# Altium PCB PCB_RedoVR noMAX_2_2023-05-25.pcbdoc
Units mil, origin at the board's own origin, x right, y up, seen from the top; angles counter-clockwise.
Board outline 3112.99 x 2445 mil, 2 copper layers (Top Layer, Bottom Layer); 45 components, 30 nets, 109 pads, 50 vias.
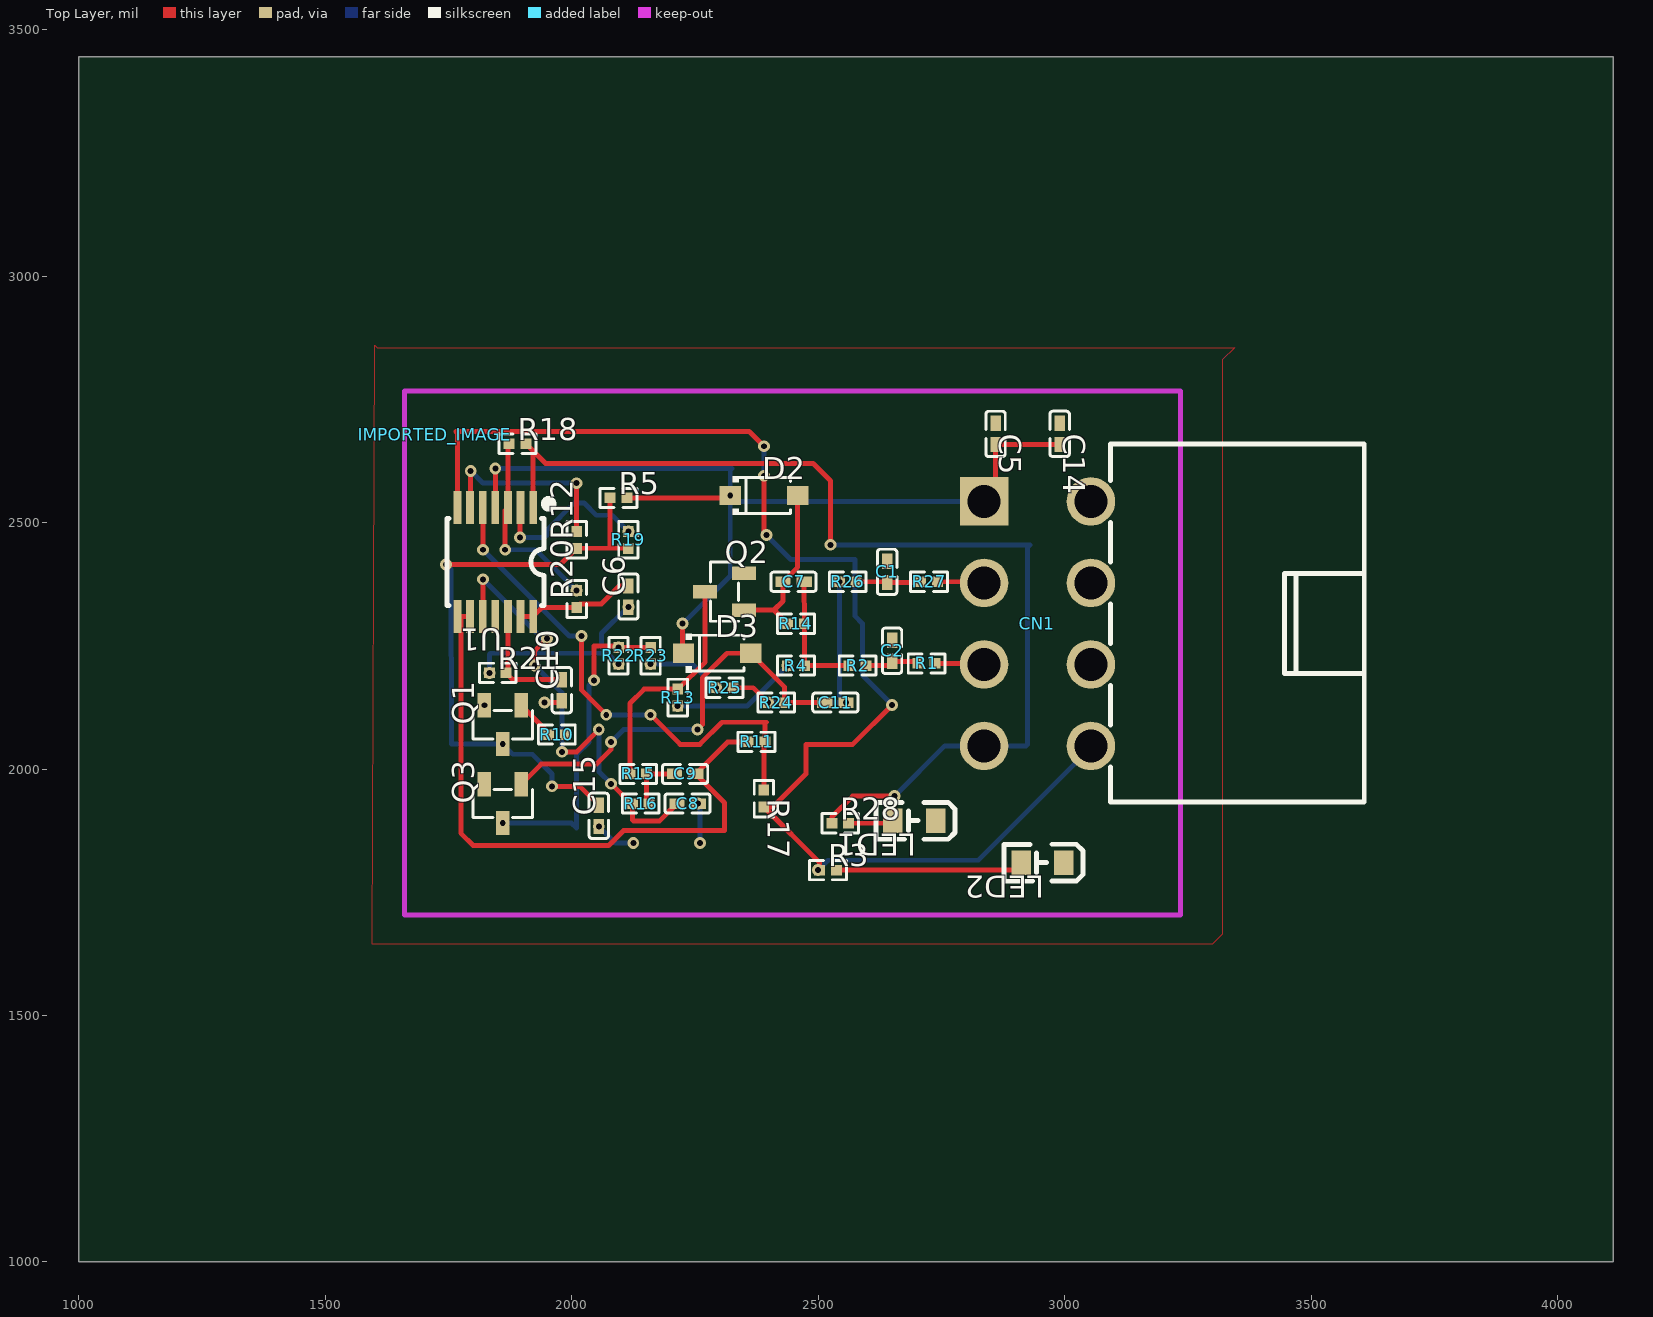
[diagram p0: Top Layer view]
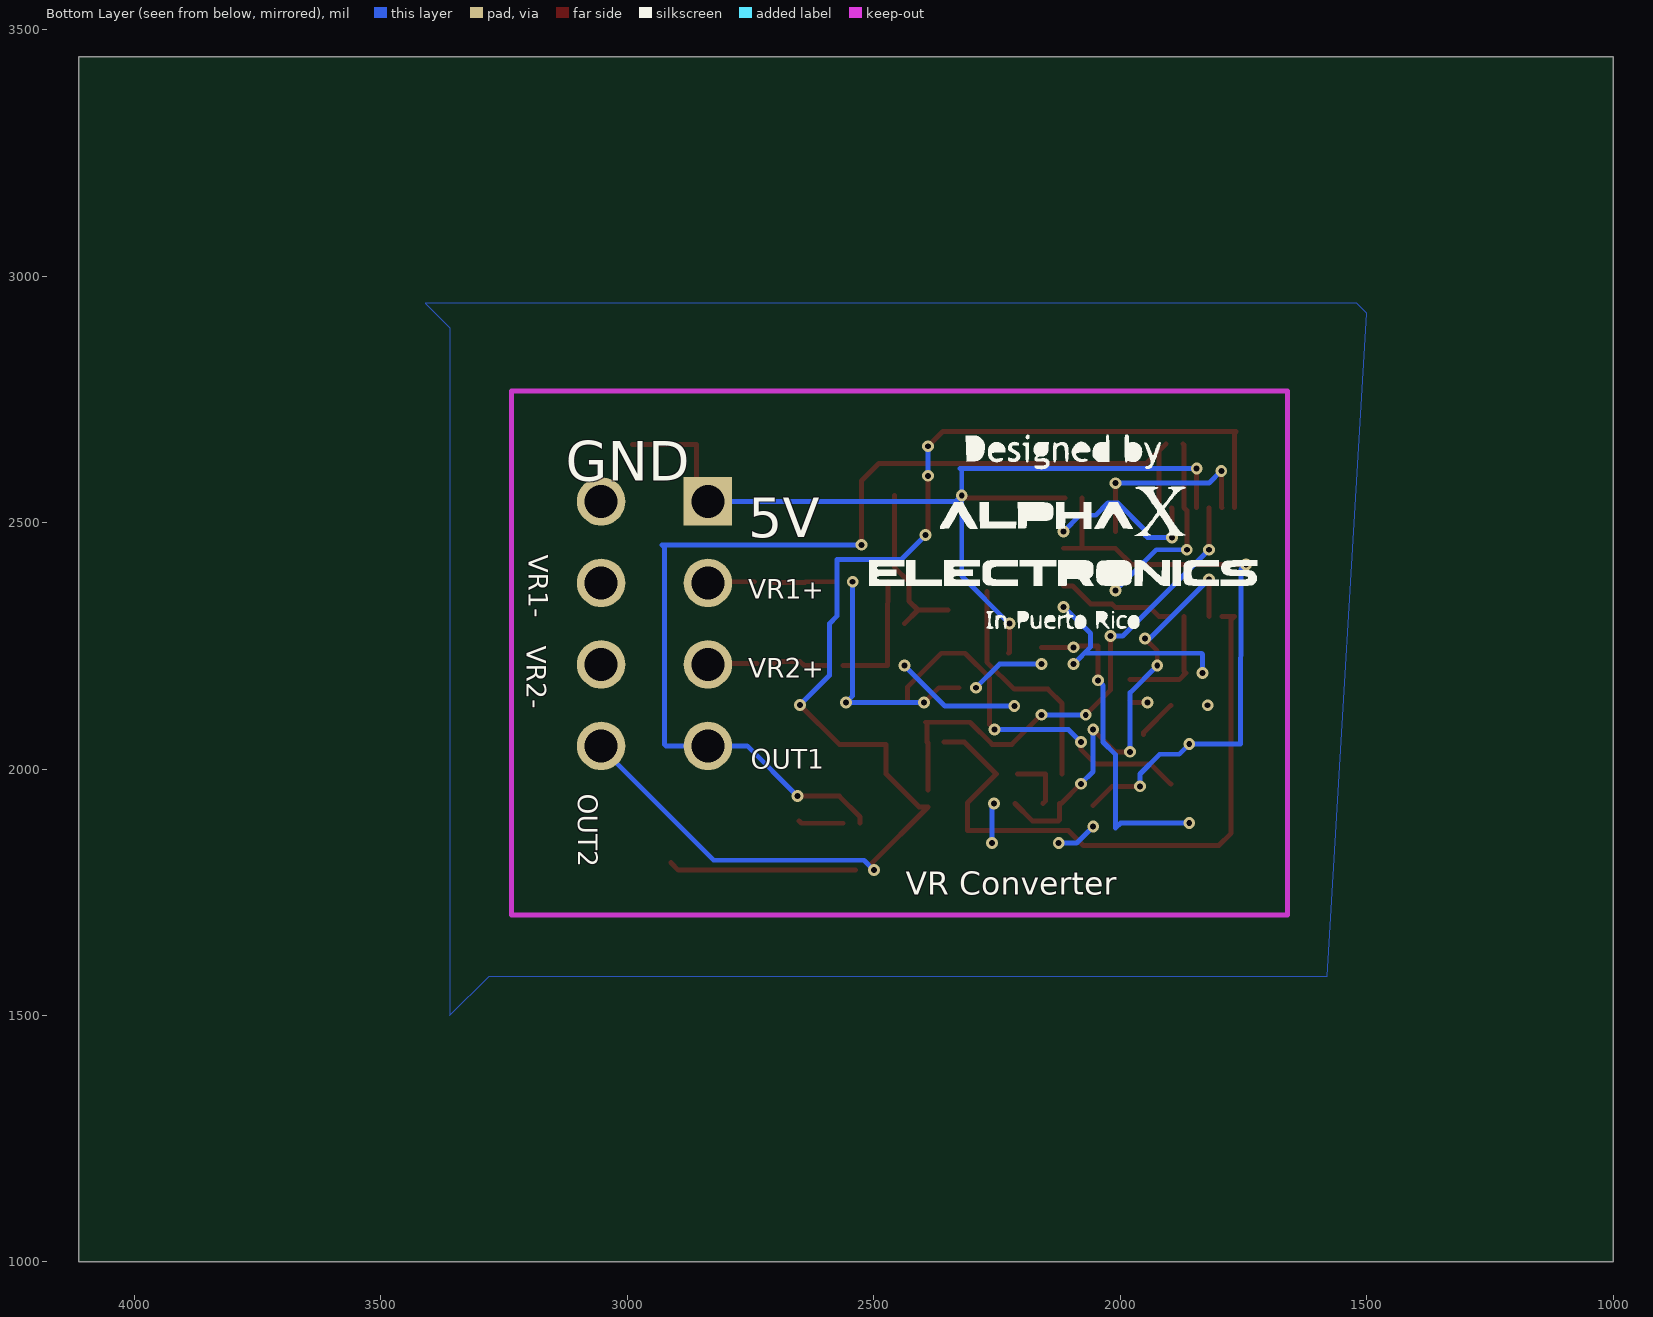
[diagram p1: Bottom Layer view, seen from below]

## Layer stack, top to bottom
Top Layer: signal copper (thickness not stored)
Dielectric: dielectric 12.6, FR-4, Dk 4.8
Bottom Layer: signal copper (thickness not stored)

## Board outline
4112.99,1000 1000,1000 1000,3445 4112.99,3445

## Components (designator, comment, footprint, x,y, rotation, side; value= is the part's Value field where it differs from the comment)
C1 "10nF" C0402 2640,2400 r270 top
C2 "10nF" C0402 2650,2240 r270 top
C5 "10uF" C0402 2860,2680 r270 top
C6 "1nF" C0402 2115,2350 r90 top
C7 "1nF" C0402 2450,2380 r180 top
C8 "100pF" C0402 2235,1930 r180 top
C9 "1nF" C0402 2230,1990 r0 top
C10 "100pF" C0402 1980,2160 r90 top
C11 "1nF" C0402 2535,2135 r180 top
C14 "100nF" C0402 2990,2680 r270 top
C15 "100nF" C0402 2055,1905 r90 top
CN1 "5557R-2*4P" CONN-TH_8P-P4.20_5557R-2X4P 2945,2295 r90 top
D2 "1N4148W_C81598" SOD-123F_L2.7-W1.6-LS3.8-RD 2390,2555 r0 top
D3 "1N4148W_C81598" SOD-123F_L2.7-W1.6-LS3.8-RD 2295,2235 r0 top
IMPORTED_IMAGE "IMPORTED_IMAGE" IMPORTED_IMAGE 1722.42,2678.34 r0 top
LED1 "XL-0805QBC" LED0805-RD 2695,1895 r180 top
LED2 "XL-0805QBC" LED0805-RD 2955,1810 r180 top
Q1 "BC857B_C475636" SOT-23-3_L2.9-W1.3-P1.90-LS2.4-BR 1860,2090 r90 top
Q2 "BC857B_C475636" SOT-23-3_L2.9-W1.3-P1.90-LS2.4-BR 2310,2360 r0 top
Q3 "BC857B_C475636" SOT-23-3_L2.9-W1.3-P1.90-LS2.4-BR 1860,1930 r90 top
R1 "1kΩ" R0402 2720,2214.23 r180 top
R2 "1kΩ" R0402 2580,2210 r180 top
R3 "10kΩ" R0402 2520,1795 r0 top
R4 "1MΩ" R0402 2455,2210 r180 top
R5 "100kΩ" R0402 2095,2550 r0 top
R10 "10kΩ" R0402 1970,2070 r0 top
R11 "1kΩ" R0402 2375,2055 r0 top
R12 "1kΩ" R0402 2010,2465 r90 top
R13 "100kΩ" R0402 2215,2145 r270 top
R14 "47kΩ" R0402 2455,2295 r180 top
R15 "27kΩ" R0402 2135,1990 r0 top
R16 "330kΩ" R0402 2140,1930 r180 top
R17 "100kΩ" R0402 2390,1940 r270 top
R18 "100kΩ" R0402 1890,2660 r0 top
R19 "1kΩ" R0402 2115,2465 r90 top
R20 "1kΩ" R0402 2010,2345 r90 top
R21 "330kΩ" R0402 1850,2195 r0 top
R22 "27kΩ" R0402 2095,2230 r270 top
R23 "100kΩ" R0402 2160,2230 r270 top
R24 "47kΩ" R0402 2415,2135 r0 top
R25 "1MΩ" R0402 2310,2165 r180 top
R26 "1kΩ" R0402 2560,2380 r180 top
R27 "1kΩ" R0402 2725,2380 r180 top
R28 "10kΩ" R0402 2545,1890 r0 top
U1 "MCP6004T-I/ST" TSSOP-14_L5.0-W4.4-P0.65-LS6.4-BL 1845,2420 r180 top

## Footprints (in the part's own frame and the unit in brackets; to place one, negate y for a bottom-side part, rotate by r counter-clockwise, add the part's x,y. Pads: shape width x height; smd on the part's side, far side on the other; paste and mask are expansions set on the pad)
C0402 [mm]
  rect 0.79x0.54 smd: 1(-0.545,0) 2(0.545,0)
  silkscreen extent -1.17,-0.5 1.17,0.5
CONN-TH_8P-P4.20_5557R-2X4P [mm]
  rect 2.5x2.5 hole 1.7: 1(6.3,2.75)
  round 2.5 hole 1.7: 2(6.3,-2.75) 3(2.1,2.75) 4(2.1,-2.75) 5(-2.1,2.75) 6(-2.1,-2.75) 7(-6.3,2.75) 8(-6.3,-2.75)
  silkscreen extent -9.2,-16.84 9.26,-3.77
IMPORTED_IMAGE [mil]
LED0805-RD [mm]
  rect 1x1.25 smd: 1(-1.1,0) 2(1.1,0)
  silkscreen extent -2.1,-0.95 1.98,0.96
R0402 [mm]
  rect 0.566x0.54 smd: 1(-0.433,0) 2(0.433,0)
  silkscreen extent -0.94,-0.5 0.94,0.5
SOD-123F_L2.7-W1.6-LS3.8-RD [mm]
  rect 1.1x1 smd: 1(-1.735,0) 2(1.735,0)
  silkscreen extent -1.6,-1 1.38,1
SOT-23-3_L2.9-W1.3-P1.90-LS2.4-BR [mm]
  rect 1.25x0.7 smd: 1(1,-0.95) 2(1,0.95) 3(-1,0)
  silkscreen extent -0.73,-1.53 0.73,1.53
TSSOP-14_L5.0-W4.4-P0.65-LS6.4-BL [mm]
  rect 0.4x1.7 smd: 1(-1.95,-2.8) 2(-1.3,-2.8) 3(-0.65,-2.8) 4(0,-2.8) 5(0.65,-2.8) 6(1.3,-2.8) 7(1.95,-2.8) 8(1.95,2.8) 9(1.3,2.8) 10(0.65,2.8) 11(0,2.8) 12(-0.65,2.8) 13(-1.3,2.8) 14(-1.95,2.8)
  silkscreen extent -2.95,-3.2 2.5,2.25

## Via types
v1: diameter 24, hole 12, Top Layer to Bottom Layer, tented both sides, 50 vias

## Nets (pads, with @x,y where several pads share a name; then routed paths per layer and width w, separated by ;. In a path a pad name is that pad's centre, name@x,y a point inside that pad or via, vN(x,y) a via of type N, cw(c..) or ccw(c..) an arc to the next point about the centre after c; other vN are vias at no path point)
+5V: C5.2 C14.2 CN1.1 D2.1 D3.1 R5.2 U1.4 | length 1963.7
  Top Layer w10: U1.4 v1(1845,2610) ; R5.2 2316.69,2550 v1(2321.7,2555) ; v1(2225,2295) 2225,2236.69 D3.1 ; CN1.1 2860,2566.3 C5.2 C14.2
  Bottom Layer w10: v1(1845,2610) 2325,2610 2321.69,2606.69 v1(2321.7,2555) ; v1(2225,2295) 2321.69,2391.69 v1(2321.7,2555) ; CN1.1 2333.66,2543.03 v1(2321.7,2555)
C6_1: C6.1 R21.1 R22.2 | length 463.7
  Bottom Layer w10: v1(1832.96,2195) 1832.96,2232.96 1835,2235 2072.96,2235 v1(2095,2212.96) 2060,2247.96 2060,2275 2113.54,2328.54 v1(2115,2328.54)
C9_2: C9.2 R11.1 U1.8 U1.9 | length 1298.6
  Top Layer w10: U1.9 U1.8 1775,2302.99 1775,1870 1800,1845 2075,1845 2105,1875 2310,1875 2310,1931.46 C9.2 2316.46,2055 R11.1
C10_2: C10.2 R21.2 U1.12 | length 234.8
  Top Layer w10: U1.12 1870.59,2198.55 R21.2 1880.58,2181.46 C10.2
C11_1: C11.1 R24.1 R25.1 R26.2 | length 492.4
  Top Layer w10: R25.1 2367.96,2165 v1(2397.96,2135)
  Bottom Layer w10: v1(2397.96,2135) v1(2556.46,2135) 2542.96,2148.5 v1(2542.96,2380)
D2_2: C7.2 D2.2 Q2.1 R14.2 | length 352.3
  Top Layer w10: Q2.1 2410.36,2322.6 ; R14.2 2410.36,2322.6 ; D2.2 2458.31,2409.77 C7.2 2428.54,2340.78 2410.36,2322.6
IN1+: CN1.3 R27.1 | length 95.7
  Top Layer w10: R27.1 2834.41,2380 CN1.3
IN1-: C1.1 C2.1 C5.1 C8.1 C10.1 C14.1 C15.1 CN1.2 CN1.4 CN1.6 LED1.1 LED2.1 Q1.2 Q2.2 Q3.2 R10.2 U1.11 | length 201.8
  Top Layer w10: v1(1945,2135) 1976.46,2135 C10.1
  Bottom Layer w10: v1(2055,1883.54) 2088.54,1850 v1(2125,1850) ; v1(2256.46,1930) 2260,1926.46 v1(2260,1850)
  other v1: 1822.6,2129.37
IN2+: CN1.5 R1.1 | length 100.5
  Top Layer w10: R1.1 2834.83,2214.23 CN1.5
LED1_2: LED1.2 R28.2 | length 91.7
  Top Layer w10: R28.2 2646.69,1890 LED1.2
LED2_2: LED2.2 R3.2 | length 380.9
  Top Layer w10: R3.2 2896.69,1795 LED2.2
OUT1: CN1.7 R18.2 R28.1 U1.1 | length 2797.4
  Top Layer w10: U1.1 1921.77,2645.27 R18.2 ; v1(2525,2455) 2525,2585 2490,2620 ; R28.1 2527.96,1902.96 2570,1945 v1(2655,1945) ; R18.2 1947.04,2620 ; R18.2 1947.04,2620 ; 1947.04,2620 2490,2620 ; 1947.04,2620 2490,2620
  Bottom Layer w10: v1(2525,2455) 2930,2455 2925,2450 2925,2050 2921.96,2046.96 CN1.7 2756.96,2046.96 v1(2655,1945)
OUT2: CN1.8 R3.1 R17.2 U1.7 | length 2890.6
  Top Layer w10: U1.7 1768.23,2681.77 1765,2685 2360,2685 v1(2390,2655) ; v1(2390,2595) 2390,2480 v1(2395,2475) ; R3.1 2502.96,1810 R17.2 ; v1(2650,2130) 2570,2050 2475,2050 ; R17.2 2407.96,1922.96 ; R17.2 2407.96,1922.96 ; 2407.96,1922.96 2475,1990 ; 2407.96,1922.96 2475,1990 ; 2475,1990 2475,2050 ; 2475,1990 2475,2050
  Bottom Layer w10: v1(2390,2595) v1(2390,2655) ; v1(2395,2475) 2445,2425 2575,2425 2575,2310 2590,2295 2590,2190 v1(2650,2130) ; v1(2500,1795) 2520,1815 2825,1815 3053.27,2043.26 CN1.8
Q1_1: Q1.1 R10.1 | length 82.4
  Top Layer w10: Q1.1 1952.96,2073.81 R10.1
Q2_3: Q2.3 R13.1 R15.1 | length 473.2
  Top Layer w10: R15.1 2117.96,2132.96 2147.04,2162.04 R13.1 2270.63,2217.04 Q2.3
Q3_1: C11.2 D3.2 Q3.1 R24.2 | length 850.3
  Top Layer w10: Q3.1 1938.03,2010 2050,2010 2080,2040 v1(2080,2055) ; v1(2255,2080) 2265,2090 2265,2185 2315,2235 D3.2 2432.04,2166.26 R24.2 C11.2
  Bottom Layer w10: v1(2080,2055) 2105,2080 v1(2255,2080)
R1_2: C2.2 R1.2 R2.1 | length 111.2
  Top Layer w10: R2.1 2641.46,2210 C2.2 2698.65,2218.54 R1.2
R2_2: C7.1 R2.2 R4.1 R14.1 | length 260.9
  Top Layer w10: C7.1 R14.1 R4.1 R2.2
R4_2: R4.2 R13.2 | length 256.9
  Bottom Layer w10: v1(2215,2127.96) 2355.92,2127.96 v1(2437.96,2210)
R11_2: R11.2 R17.1 U1.5 | length 1047.2
  Top Layer w10: U1.5 1820,2529.65 v1(1820,2445) ; v1(2020,2270) 2020,2160 v1(2070,2110) ; v1(2160,2110) 2220,2050 2260,2050 2305,2095 2395,2095 2392.04,2092.04 R11.2 2390,2052.96 R17.1
  Bottom Layer w10: v1(1820,2445) 1995,2270 v1(2020,2270) ; v1(2070,2110) v1(2160,2110)
R12_2: R12.2 U1.6 | length 398.6
  Top Layer w10: U1.6 1795,2531.42 v1(1795,2605) ; R12.2 v1(2010,2580)
  Bottom Layer w10: v1(1795,2605) 1820,2580 v1(2010,2580)
R15_2: C9.1 R15.2 R16.1 | length 118.6
  Top Layer w10: R16.1 2152.04,1935 R15.2 C9.1
R16_2: C8.2 R16.2 U1.10 | length 930.7
  Top Layer w10: U1.10 1820,2310.35 v1(1820,2385) ; v1(1925,2210) 1925,2240 v1(1950,2265) ; v1(1980,2035) 2010,2035 v1(2055,2080) ; v1(2080,1970) 2120,1930 R16.2 2122.96,1897.04 2125,1895 2178.54,1895 C8.2
  Bottom Layer w10: v1(1820,2385) 1940,2265 v1(1950,2265) ; v1(1925,2210) 1980,2155 1980,2138.54 v1(1980,2035) ; v1(2055,2080) 2055,1995 v1(2080,1970)
R18_1: R18.1 R20.2 U1.3 | length 397.7
  Top Layer w10: v1(1865,2445) 1865,2524.65 U1.3 1870.59,2657.63 R18.1
  Bottom Layer w10: v1(1865,2445) 1927.04,2445 v1(2010,2362.04)
R19_2: R19.2 U1.2 | length 339.6
  Top Layer w10: v1(1895,2470) 1895,2529.06 U1.2
  Bottom Layer w10: v1(1895,2470) 1945,2470 1950,2475 1950,2485 2005,2540 2025,2540 2050,2515 2082.04,2515 v1(2115,2482.04)
R20_1: C6.2 R20.1 U1.13 U1.14 | length 244.4
  Top Layer w10: U1.13 U1.14 1939.97,2327.96 R20.1 2017.04,2335 2060,2335 2096.46,2371.46 C6.2
R22_1: Q3.3 R22.1 R23.1 | length 655.1
  Top Layer w10: v1(2045,2180) 2045,2250 2092.04,2250 v1(2095,2247.04) R23.1
  Bottom Layer w10: v1(1860,1890.63) 1999.37,1890.63 2010,1880 2010,2030 2035,2055 2035,2170 v1(2045,2180)
R23_2: R23.2 R25.2 | length 152.8
  Bottom Layer w10: v1(2160,2212.96) 2245,2212.96 v1(2292.96,2165)
R26_1: C1.2 R26.1 R27.2 | length 132.1
  Top Layer w10: R26.1 2638.54,2380 C1.2 2706.5,2378.54 R27.2
REF: C15.2 Q1.3 R5.1 R12.1 R19.1 | length 1219.7
  Top Layer w10: v1(1745,2415) 1977.04,2415 R12.1 R19.1 ; v1(1960,1965) 2016.46,1965 C15.2 ; 2077.54,2447.96 R5.1
  Bottom Layer w10: v1(1745,2415) 1755,2405 1755.63,2050.63 v1(1860,2050.63) 1880.63,2030 1920,2030 1960,1990 v1(1960,1965)

## Polygon pours and split planes (outlines as drawn)
IN1- on Top Layer (solid): 1600,2860 1605,2855 3345,2855 3320,2830 3320,1665 3300,1645 1595,1645
IN1- on Bottom Layer (solid): 1500,2925 1520,2945 3410,2945 3360,2895 3360,1500 3280,1580 1580,1580

## Silkscreen, mask and mechanical layers (free items; w line width, h text height)
Bottom Overlay:
  text "GND" at 3125,2585 h80
  text "5V" at 2755,2470 h80
  text "VR1-" at 3199.68,2435 h39.37 r90
  text "VR1+" at 2755,2345.32 h39.37
  text "VR2-" at 3204.68,2250 h39.37 r90
  text "VR2+" at 2755,2185.32 h39.37
  text "OUT1" at 2750,2000.32 h39.37
  text "OUT2" at 3099.68,1950 h39.37 r90
  text "VR Converter" at 2435,1730 h80